# Altium PCB HW_PCB.PcbDoc
Units mil, origin at the board's own origin, x right, y up, seen from the top; angles counter-clockwise.
Board outline 3602.36 x 3366.14 mil, 2 copper layers (Top Layer, Bottom Layer); 78 components, 64 nets, 285 pads, 21 vias.
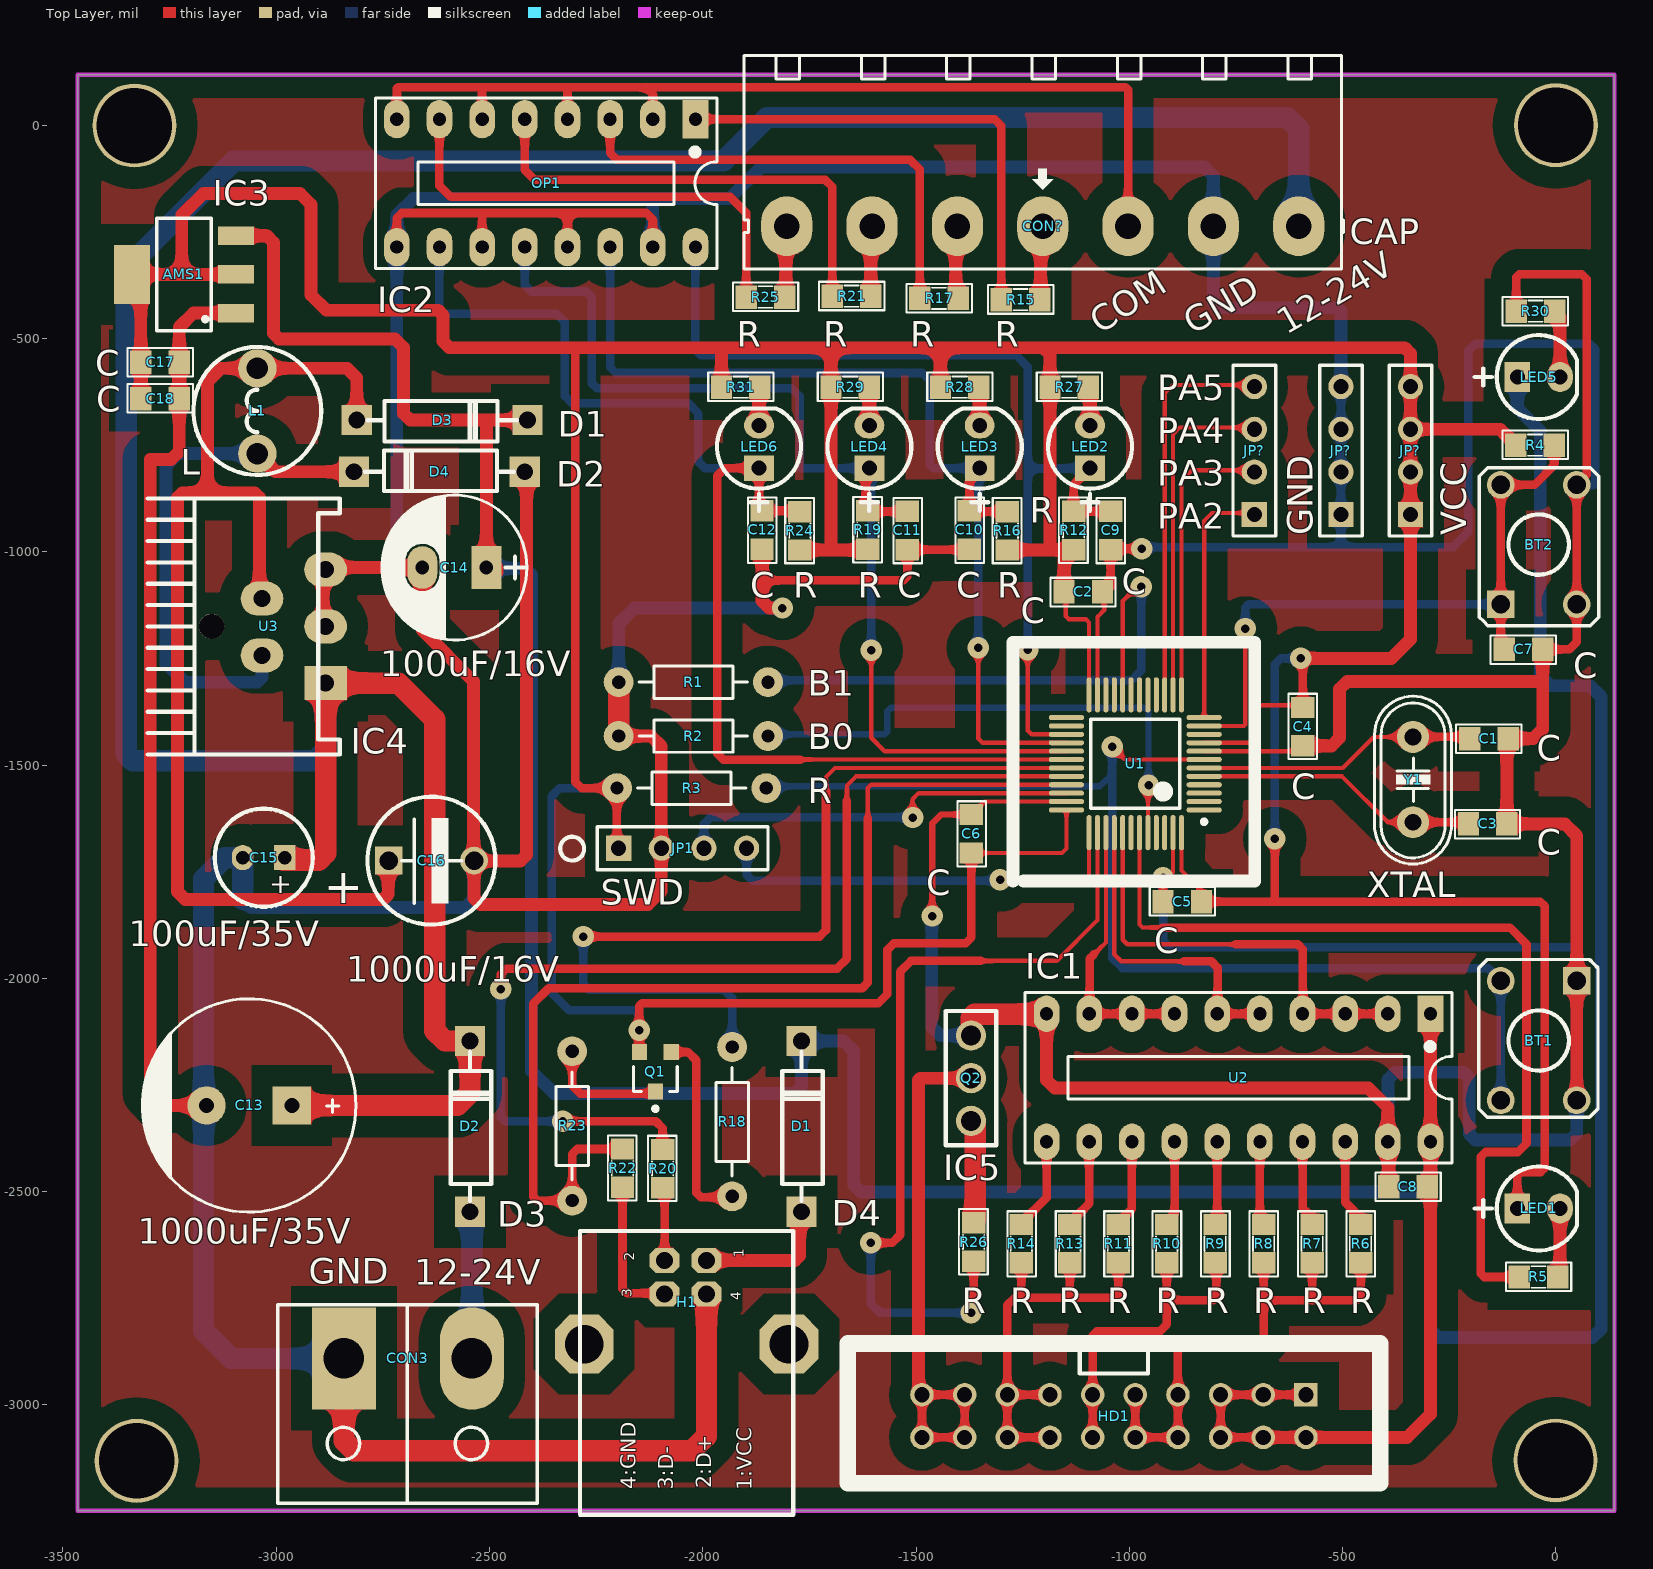
[diagram p0: Top Layer view]
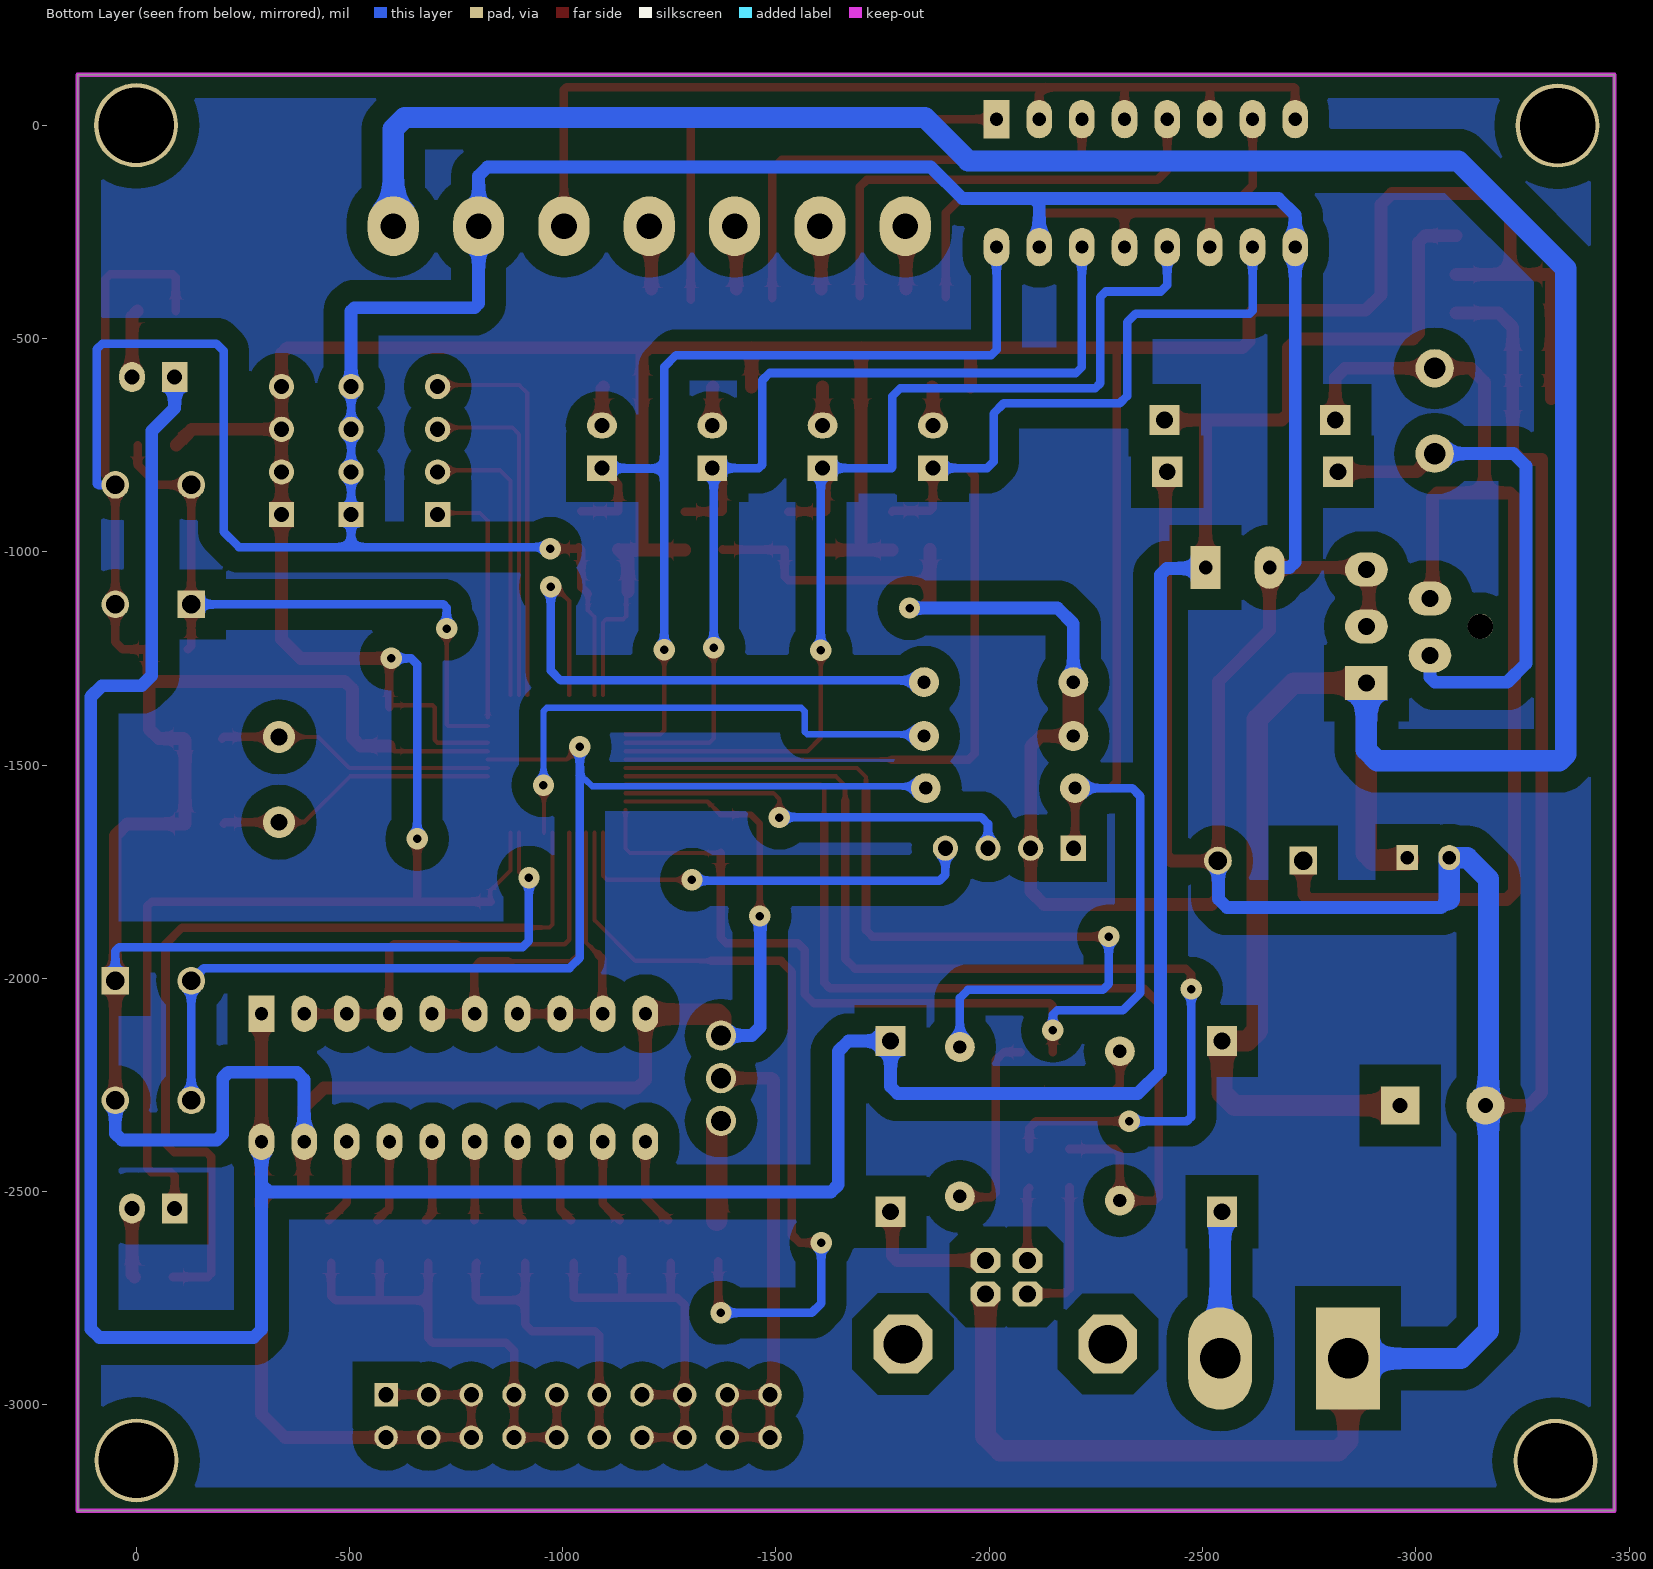
[diagram p1: Bottom Layer view, seen from below]

## Layer stack, top to bottom
Top Solder: solder mask 0.4, Solder Resist, Dk 3.5
Top Layer: signal copper 1.4
Dielectric 1: dielectric 12.6, FR-4, Dk 4.8
Bottom Layer: signal copper 1.4
Bottom Solder: solder mask 0.4, Solder Resist, Dk 3.5

## Board outline
-3465.3,-3247.9 -3465.3,118.25 137.07,118.25 137.07,-3247.9

## Design rules (kind name [scope] priority, off if disabled: settings)
Clearance [All] p1: gap=9 ignorepadtopadclearanceinfootprint=FALSE except(50: Arc-Poly Track-Poly SMDPad-Poly THPad-Poly Via-Poly Fill-Poly Poly-Poly)
PolygonConnect [All] p1: connectstyle=Relief reliefconductorwidth=10 reliefentries=4 polygonreliefangle="90 Angle" airgapwidth=10
RoomDefinition HW_SCH [InComponentClass('HW_SCH')] p1: confinementstyle=ConfineIn formatcopy=TRUE lockcomponents=FALSE outline -30306,-17046 -28306,-17046 -28306,-16046 -30306,-16046
RoutingVias [All] p1: holewidth=28 width=50 viastyle="Through Hole" minholewidth=28 minwidth=50 maxholewidth=28 maxwidth=50
SolderMaskExpansion [All] p1: expansion=4
Width [All] p1: maxlimit=70 minlimit=10 preferedwidth=10
30 further rules are at their usual default settings.

## Components (designator, comment, footprint, x,y, rotation, side; value= is the part's Value field where it differs from the comment)
AMS1 "AMS1117-3.3V SOT223 _MH" SOT223 -3216,-350 r90 top
BT1 "BUTTON 4P 6x6_MH" "BUTTON 4 PIN(6*6)" -40.37,-2145.75 r270 top
BT2 "BUTTON 4P 6x6_MH" "BUTTON 4 PIN(6*6)" -40.37,-983.25 r90 top
C1 "20p" TU_SMD_0805 -157,-1438 r0 top
C2 "104" TU_SMD_0805 -1108,-1094 r0 top
C3 "20p" TU_SMD_0805 -160,-1638 r0 top
C4 "104" TU_SMD_0805 -593,-1410 r270 top
C5 "104" TU_SMD_0805 -876,-1820 r180 top
C6 "104" TU_SMD_0805 -1370,-1661 r90 top
C7 "104" TU_SMD_0805 -76,-1229 r0 top
C8 "104" TU_SMD_0805 -347,-2489 r180 top
C9 "104" TU_SMD_0805 -1044,-950 r90 top
C10 "104" TU_SMD_0805 -1374.71,-949 r90 top
C11 "104" TU_SMD_0805 -1520,-950 r90 top
C12 "104" TU_SMD_0805 -1861,-949 r90 top
C13 "10uF" CP2/5 -3063,-2298 r180 top value=10uF/50V
C14 "100uF/16V" "TU_HOA(100uF/35V - 470uF/16V)" -2582,-1037 r180 top value=100uF/35V/50V
C15 "100uF - 35V" "TU HOA 8mm" -3029,-1717 r180 top
C16 "1000uF - 16V" "TU HOA 1000uF25V" -2636,-1724 r180 top
C17 "104" TU_SMD_0805 -3272,-556 r180 top
C18 "106" TU_SMD_0805 -3272,-641 r180 top
CON3 "CON 2 KF762_MH" "Con 2 KF762" -2691,-2891 r0 top
CON? "CON 7 EDG 5.08_MH" "Con 7 EDG 5.08" -1203,-237 r180 top
D1 "ss34" SS14 -1766,-2366 r90 top
D2 "Diode 1N4001 DO41 1A 50V (DIP)_MH" SS14 -2543,-2366 r90 top
D3 "ss34" SS14 -2630,-694 r0 top
D4 "ss34" SS14 -2598,-810 r180 top
H1 "USB_MH" USB-B-STRANGE -1991,-2661 r90 top
HD1 "IDE 20" "CABLE 20" -586,-2976 r180 top
JP1 "KHOI NAP" "Jump 4" -2047,-1695 r0 top
JP? "Jump 4_MH" "Jump 4" -707,-763 r90 top
JP? "Jump 4_MH" "Jump 4" -341,-763 r90 top
JP? "Jump 4_MH" "Jump 4" -504,-763 r90 top
L1 "100uH/3A" L100uH3A -3044,-670 r90 top
LED1 "LED3" "LED 3mm Do" -40.37,-2539.45 r0 top
LED2 "LED3" "LED 3mm Do" -1092,-754 r90 top
LED3 "LED3" "LED 3mm Do" -1350.67,-754 r90 top
LED4 "LED3" "LED 3mm Do" -1609.33,-754 r90 top
LED5 "LED3" "LED 3mm Do" -40.37,-590.55 r0 top
LED6 "LED3" "LED 3mm Do" -1868,-754 r90 top
OP1 "TLP521-4GB DIP16 _MH" DIP16 -2367,-136 r180 top value=TLP521-4
Q1 "A1015" SOT23 -2111,-2219 r180 top
Q2 "IRF540N TO220 MOSFET N-CH 28A 100V_MH" G_D_S_TO220 -1371,-2234 r90 top
R1 "2k2" "TRO_VACH_ 1/4W" -2197,-1305.67 r0 top
R2 "2k2" "TRO_VACH_ 1/4W" -2197,-1432 r0 top
R3 "10K" "TRO_VACH_ 1/4W" -1851,-1554 r180 top
R4 "10K" "Tro SMD 0805" -49,-750 r180 top
R5 "220" "Tro SMD 0805" -41,-2700 r180 top
R6 "220" "Tro SMD 0805" -458,-2622 r90 top
R7 "220" "Tro SMD 0805" -571.56,-2622 r90 top
R8 "220" "Tro SMD 0805" -685.13,-2622 r90 top
R9 "220" "Tro SMD 0805" -798.69,-2622 r90 top
R10 "220" "Tro SMD 0805" -912.26,-2622 r90 top
R11 "220" "Tro SMD 0805" -1025.82,-2622 r90 top
R12 "4k7" "Tro SMD 0805" -1130.57,-950 r270 top
R13 "220" "Tro SMD 0805" -1139.39,-2622 r90 top
R14 "220" "Tro SMD 0805" -1252.95,-2622 r90 top
R15 "2K2" "Tro SMD 0805" -1255,-409 r180 top
R16 "4k7" "Tro SMD 0805" -1286.14,-951 r270 top
R17 "2K2" "Tro SMD 0805" -1446,-406 r180 top
R18 "1K" "TRO_VACH_ 1/4W" -1931,-2161 r270 top
R19 "4k7" "Tro SMD 0805" -1613,-949 r270 top
R20 "22R" "Tro SMD 0805" -2094,-2446 r270 top
R21 "2K2" "Tro SMD 0805" -1651,-401 r180 top
R22 "22R" "Tro SMD 0805" -2188,-2445 r270 top
R23 "1.5k" "TRO_VACH_ 1/4W" -2306,-2171 r270 top
R24 "4k7" "Tro SMD 0805" -1772.43,-951 r270 top
R25 "2K2" "Tro SMD 0805" -1853,-403 r180 top
R26 "220" "Tro SMD 0805" -1365,-2618 r270 top
R27 "1K" "Tro SMD 0805" -1141,-614 r180 top
R28 "1K" "Tro SMD 0805" -1397.67,-614 r180 top
R29 "1K" "Tro SMD 0805" -1654.33,-614 r180 top
R30 "1k" "Tro SMD 0805" -48,-436 r0 top
R31 "1K" "Tro SMD 0805" -1911,-614 r180 top
U1 "STM32F103C8T6 LQFP48 _MH" 48A_M -986,-1497 r180 top
U2 "74HC245" dip20 -744,-2232 r180 top
U3 "LM2576T TO220-5_MH" LM2576t -3051,-1176 r90 top
Y1 "8Mhz" XT2 -335,-1534 r90 top

## Footprints (in the part's own frame and the unit in brackets; to place one, negate y for a bottom-side part, rotate by r counter-clockwise, add the part's x,y. Pads: shape width x height; smd on the part's side, far side on the other; paste and mask are expansions set on the pad)
48A_M [mm] "Thin QFP, 48-Leads, Body 7x7mm, Pitch 0.5mm, IPC Low Density"
  oval 2.1x0.3 smd: 1(-4.1,2.75) 2(-4.1,2.25) 3(-4.1,1.75) 4(-4.1,1.25) 5(-4.1,0.75) 6(-4.1,0.25) 7(-4.1,-0.25) 8(-4.1,-0.75) 9(-4.1,-1.25) 10(-4.1,-1.75) 11(-4.1,-2.25) 12(-4.1,-2.75) 25(4.1,-2.75) 26(4.1,-2.25) 27(4.1,-1.75) 28(4.1,-1.25) 29(4.1,-0.75) 30(4.1,-0.25) 31(4.1,0.25) 32(4.1,0.75) 33(4.1,1.25) 34(4.1,1.75) 35(4.1,2.25) 36(4.1,2.75)
  oval 0.3x2.1 smd: 13(-2.75,-4.1) 14(-2.25,-4.1) 15(-1.75,-4.1) 16(-1.25,-4.1) 17(-0.75,-4.1) 18(-0.25,-4.1) 19(0.25,-4.1) 20(0.75,-4.1) 21(1.25,-4.1) 22(1.75,-4.1) 23(2.25,-4.1) 24(2.75,-4.1) 37(2.75,4.1) 38(2.25,4.1) 39(1.75,4.1) 40(1.25,4.1) 41(0.75,4.1) 42(0.25,4.1) 43(-0.25,4.1) 44(-0.75,4.1) 45(-1.25,4.1) 46(-1.75,4.1) 47(-2.25,4.1) 48(-2.75,4.1)
  silkscreen extent -4.23,-2.65 2.65,3.57, body extent -3.5,-3.5 3.5,3.5, height 1.6
"BUTTON 4 PIN(6*6)" [mil] "BUTTON SMORE 280mil x 178mil"
  rect 65x65 hole 43.31: 1(-140,89)
  round 65 hole 43.31: 1(140,89) 2(-140,-89) 2(140,-89)
  silkscreen extent -190,-141 180,139, body extent -159,-124 153,120, height 276
"CABLE 20" [mm] "Connector; Header; 5x2 Position"
  rect 1.4x1.4 hole 0.9: 1(0,0)
  round 1.4 hole 0.9: 2(0,2.54) 3(2.54,0) 4(2.54,2.54) 5(5.08,0) 6(5.08,2.54) 7(7.62,0) 8(7.62,2.54) 9(10.16,0) 10(10.16,2.54) 11(12.7,0) 12(12.7,2.54) 13(15.24,0) 14(15.24,2.54) 15(17.78,0) 16(17.78,2.54) 17(20.32,0) 18(20.32,2.54) 19(22.86,0) 20(22.86,2.54)
  silkscreen extent -4.42,-3.05 27.28,5.27, body extent -5.02,-3.63 27.88,5.77, height 9.3
"Con 2 KF762" [mil]
  rect 150x240 hole 95: 1(-150,0)
  oval 150x240 hole 95: 2(150,0)
  silkscreen extent -306,-339 304,126
"Con 7 EDG 5.08" [mil]
  oval 120x140 hole 60: 1(-600,0) 2(-400,0) 3(-200,0) 4(0,0) 5(200,0) 6(400,0) 7(600,0)
  silkscreen extent -705,-400 700,100, body extent -696,-402 697,70, height 334
CP2/5 [mil] "Tu hoa 1000uF/25V,50V"
  rect 90x90 hole 35: 1(-100,0)
  round 90 hole 35: 2(100,0)
  silkscreen extent -250,-250 250,250, body extent -241,-247 251,245, height 984
DIP16 [mil] "16 PIN, W 300mil, Pin to pin 100mil"
  rect 60x90 hole 31: 1(-350,-150)
  oval 60x90 hole 31: 2(-250,-150) 3(-150,-150) 4(-50,-150) 5(50,-150) 6(150,-150) 7(250,-150) 8(350,-150) 9(350,150) 10(250,150) 11(150,150) 12(50,150) 13(-50,150) 14(-150,150) 15(-250,150) 16(-350,150)
  silkscreen extent -400,-200 400,200, body extent -402,-207 402,206, height 299
dip20 [mil]
  rect 60x85 hole 31: 1(-450,-149)
  oval 60x85 hole 31: 2(-350,-149) 3(-250,-149) 4(-150,-149) 5(-50,-149) 6(50,-149) 7(150,-149) 8(250,-149) 9(350,-149) 10(450,-149) 11(450,151) 12(350,151) 13(250,151) 14(150,151) 15(50,151) 16(-50,151) 17(-150,151) 18(-250,151) 19(-350,151) 20(-450,151)
  silkscreen extent -500,-199 500,201, body extent -541,-167 495,173, height 155
G_D_S_TO220 [mm]
  round 1.8 hole 1.2: 1(-2.54,0) 2(0,0) 3(2.54,0)
  silkscreen extent -4,-1.5 4,1.5, body extent -5.16,-1.71 5,2.5, height 20.36
"Jump 4" [mm]
  rect 1.5x1.5 hole 0.9: 1(-3.81,0)
  round 1.5 hole 0.9: 2(-1.27,0) 3(1.27,0) 4(3.81,0)
  silkscreen extent -5.08,-1.27 5.08,1.27, body extent -5.08,-1.27 5.08,1.27, height 7
L100uH3A [mil] "100uH3A"
  round 90 hole 50: 1(-100,0) 2(100,0)
  silkscreen extent -150,-150 150,150
"LED 3mm Do" [mil] "Footprintf LED phi 3"
  rect 60x70 hole 35: 1(-50,0)
  oval 60x70 hole 35: 2(50,0)
  silkscreen extent -150,-98 90,98, body extent -77,-78 60,78, height 205
LM2576t [mil]
  rect 80x100 hole 40: 1(-132,-167.09)
  oval 80x100 hole 40: 2(-67,-18) 3(1,-167) 4(66,-18) 5(134,-167)
  round 59.06 hole 59.06: ""(1,100)
  silkscreen extent -299,-200 301,250, body extent -199,-175 201,150, height 859
SOT23 [mm] "SOT-23; 3 Leads; Body 3.1 x 2.5 mm, inc. leads (LxW max), Alternate Lead Configuration"
  rect 0.9x0.95 smd: 1(-0.95,-1.175) 2(0.95,-1.175) 3(0,1.175)
  silkscreen extent -1.3,-0.3 1.3,2.32, body extent -1.5,-1.25 1.5,1.25, height 1.05
SOT223 [mm] "SOT-223/SC-73; 4 Leads; Body 6.7 x 7.3 mm, inc. leads (LxW max)"
  rect 1.1x2.15 smd: 1(-2.3,-3.1) 2(0,-3.1) 3(2.3,-3.1)
  rect 3.5x2.15 smd: 4(0,3.1)
  silkscreen extent -3.35,-1.63 3.35,1.63, body extent -3.43,-1.65 3.43,1.65, height 2.54
SS14 [mm]
  rect 1.8x1.8 hole 1: 1(-4.595,0.064) 2(5.565,0.064)
  silkscreen extent -3.96,-1.21 4.93,1.21, body extent -4.98,-1.22 5.95,1.35, height 2.55
"Tro SMD 0805" [mil]
  rect 50x55 smd: 1(-45,0) 2(45,0)
  silkscreen extent -77,-34 76,33, body extent -62,-28 56,27, height 21
"TRO_VACH_ 1/4W" [mil] "R 1/4W, 2 Pin, 350mil"
  round 70 hole 31: 1(0,0) 2(350,0)
  silkscreen extent 48,-38 302,38, body extent -40,-47 386,47, height 111
"TU HOA 8mm" [mm]
  rect 1.3x1.5 hole 0.8: 1(-1.25,0)
  oval 1.3x1.5 hole 0.8: 2(1.25,0)
  silkscreen extent -2.92,-2.92 2.92,2.92, body extent -3.15,-3.15 3.16,3.15, height 11.51
"TU HOA 1000uF25V" [mil]
  rect 65x65 hole 43.31: 1(100,0)
  round 65 hole 43.31: 2(-100,0)
  silkscreen extent -150,-150 150,150, body extent -195,-200 205,200, height 400
"TU_HOA(100uF/35V - 470uF/16V)" [mil]
  rect 70x100 hole 32: 1(-75,0)
  oval 70x100 hole 32: 2(75,0)
  silkscreen extent -170,-170 170,170, body extent -160,-157 155,157, height 446
TU_SMD_0805 [mil]
  rect 50x55 smd: 1(-45,0) 2(45,0)
  silkscreen extent -77,-34 76,33, body extent -40,-27 40,23, height 24
USB-B-STRANGE [mm] "USB Type B - STRANGE - Slave Device"
  oct 1.5x1.8 hole 1: 1(0,0) 2(0,2.5) 3(-2,2.5) 4(-2,0)
  oct 3.5x3.5 hole 2.3: 5(-4.988,7.283) 6(-4.988,-4.909)
  silkscreen extent -15.15,-5.16 1.74,7.54, body extent -15.45,-6.18 0.85,8.68, height 10.98
XT2 [mm] "Footpin for Crystal 2 pin"
  round 1.905 hole 1: 1(-2.54,0) 2(2.54,0)
  silkscreen extent -5.03,-2.29 4.96,2.29, body extent -5.93,-2.36 5.42,2.29, height 3.5

## Part data
BT1 BT2: "Nút nh?n 4 chân, 6x6mm, c?m"
C1 C2 C3 C4 C5 C6 C7 C8 C9 C10 C11 C12 C17 C18: library part TU_SMD_0805_MH
C13: library part TU_HOA_47uF_100V_MH, "TU_HOA_47uF_100V_MH", Description 1="10 => 220uF/6,3V/10V - 10uF => 100uF/16V", Description 2="0,1uF => 33uF/50V - 10uF => 22uF/63V", Description 3="0,47uF => 10uF/100V"
C14: library part TU_HOA_100uF_16V_MH, "TU_HOA_100uF_16V", Description 1="1000uF/6,3V - 470uF/16V - 330uF - 25V", Description 2="220uF/35V - 100uF/50V - 63V - 4,7uF/200V", Description 3="22uF => 33uF100V - 3,3uF => 4,7uF/250V", Description 4="2,2uF =>3,3uF/350 - 2,2uF/400V - 1uF/450V"
C15: library part "Tu Hoa 100uF 35V", "C?m", Chung_Loai=C?m, Don_Vi=Con, Ma_Hang=MH002807, Ten_Linh_Kien="T? Hóa 100uF 35V 8x11MM"
C16: library part "Tu Nhom 1000uF - 16V", "Dán", Chung_Loai=Dán, Don_Vi=Con, Ma_Hang=MH004419, Ten_Linh_Kien="T? Nhôm 1000uF 16V 10x10MM"
CON3: "CON 2 KF762 - 2P 7.62mm"
CON?: "CON 7 EDG 5.08 (xanh cong)"
D1 D3 D4: library part "Diode 1N4007 1A_MH", "Diode 1N4007 1A"
D2: "Diode 1N4001 DO41 1A 50V (DIP)"
H1: "USB conector"
HD1: "IDE header 20P"
JP1: library part "Jump 4_MH", "Jump 4P 2.54"
JP? JP? JP?: "Jump 4P 2.54"
L1: library part L100uH3A, "Cuon cam"
LED1 LED2 LED3 LED4 LED5 LED6: library part "LED 3mm_MH", "LED 3mm"
Q1: library part "A1015 SOT23 TRANS PNP 0.15A 50V ( SMD-BA)_MH"
R1 R2 R3 R4 R5 R6 R7 R8 R9 R10 R11 R13 R14 R18 R23 R26: library part TRO_VACH_1/4W_MH
R12 R15 R16 R17 R19 R20 R21 R22 R24 R25 R27 R28 R29 R30 R31: library part TRO_SMD_0805_MH, "TRO_SMD_0805"
U2: library part "74HC245 DIP20_MH"
U3: "SIMPLE SWITCHER; 3A Step-Down Voltage Regulator", DigiKeyPartNumber=LM2576T-5.0-ND, Manufacturer="National Semiconductor", PackageTopMarking="NSUZXYTT*LM2576T*-5.0 P+", PartNumber=LM2576T-5.0, PowerWise=N, Code_JEDEC=TO-220-AB, ComponentLink1Description="LM2576 Datasheet", ComponentLink1URL=http://www.national.com/ds/LM/LM2576.pdf, ComponentLink2Description="LM2576 Web Page", ComponentLink2URL=http://www.national.com/pf/LM/LM2576.html, ComponentLink3Description="T05A Package Page", ComponentLink3URL=http://www.national.com/packaging/folders/t05a.html, CompType=Switcher, DatasheetVersion=Aug-2004, FirstPublished=4-Dec-2008, PackageDescription="TO-220, Molded, 5 Lead, Straight", PackageReference=T05A, PackageVersion="revJ, Jan-1992", PinCount=5, Publisher="Altium Limited", RoHS=O
Y1: library part "CRYSTAL_49S DIP_MH", "Crystal Oscillator", LatestRevisionDate=17-Jul-2002, LatestRevisionNote="Re-released for DXP Platform.", PackageReference=R38, Published=8-Jun-2000, Publisher="Altium Limited"

## Free pads (board coordinates)
  round 196.85 hole 177.17: 2(0,0) 3(-1,-3130) 4(-3327,-3131) 5(-3332,-1)

## Via types
v1: diameter 50, hole 20, Top Layer to Bottom Layer, tented both sides, 21 vias

## Nets (pads, with @x,y where several pads share a name; then routed paths per layer and width w, separated by ;. In a path a pad name is that pad's centre, name@x,y a point inside that pad or via, vN(x,y) a via of type N, cw(c..) or ccw(c..) an arc to the next point about the centre after c; other vN are vias at no path point)
3.3V: AMS1.2 AMS1.4 C2.1 C4.1 C5.1 C6.1 C17.2 C18.2 JP1.1 JP?.1@-341,-913 JP?.2@-341,-813 JP?.3@-341,-713 JP?.4@-341,-613 LED1.1 Q1.2 R3.2 R4.2 R12.2 R16.2 R19.2 R24.2 R27.2 R28.2 R29.2 R31.2 U1.9 U1.24 U1.36 U1.48 | length 13438.1
  Top Layer w10: C6.1 -1158,-1706 -1147.42,-1695.42 U1.36 ; C2.1 -1149,-1098 -1149,-1151 -1142,-1158 -1102,-1158 -1094.27,-1165.73 U1.24 ; U1.48 -877.73,-1747.27 -830,-1795 C5.1@-830,-1820 ; U1.9 -706.79,-1447.79 -700,-1441 -700,-1365 -695,-1360 -598,-1360 C4.1
  Top Layer w20: -2294,-521.67 -2299,-526.67 -2299,-1539 -2284,-1554 R3.2 -2201,-1672 JP1.1@-2178,-1695 ; v1(-2149,-2122) -2149,-2065 -2142,-2058 -1588,-2058 -1567,-2037 -1567,-1933 -1552,-1918 -1384,-1918 -1370,-1904 C6.1 ; Q1.2 v1@-2148.4,-2122 ; C5.1 -830,-1820 -37,-1820 -26,-1831 -26,-2444 -36,-2454 -81,-2454 -90.37,-2463.37 LED1.1 ; -659,-1817 v1(-659,-1673) ; v1(-598,-1250) -593,-1255 C4.1
  Top Layer w30: C18.2 C17.2 -3317,-371.05 AMS1.4 -3221,-350 ; AMS1.2 -3221,-350 ; R31.2 -1956,-538 ; R24.2 -1701,-996 ; R19.2 -1615,-996 -1701,-996 ; R28.2 -1442.67,-521.67 ; R16.2 -1182,-996 ; C2.1 -1153,-1017.43 R12.2@-1131.57,-996 ; R12.2 R12.2@-1131.57,-996 ; v1(-598,-1250) -386,-1250 -341,-1205 -341,-913 -341,-813 JP?.3@-341,-713 ; R4.2 -131,-713 JP?.3@-341,-713 ; -3221,-350 -3221,-211 -3170,-160 -2944,-160 -2918,-186 -2918,-398 -2882,-434 -2620,-434 -2608.5,-445.5 -2608.5,-506.5 -2593.33,-521.67 -2294,-521.67 -1699.33,-521.67 ; -1701,-996 -1699.33,-994.33 R29.2 -1699.33,-521.67 ; -1699.33,-521.67 -1442.67,-521.67 ; -1442.67,-521.67 -1202.33,-521.67 ; -1202.33,-521.67 -354.33,-521.67 -341,-535 -341,-613 JP?.3@-341,-713 ; -1202.33,-521.67 -1186,-538 R27.2 -1186,-992 -1182,-996 ; -1182,-996 R12.2@-1131.57,-996
  Bottom Layer w20: R3.2 -2335,-1554 -2354,-1573 -2354,-2034 -2313,-2075 -2159,-2075 -2149,-2085 v1(-2149,-2122) ; v1(-659,-1673) -659,-1264 -645,-1250 v1(-598,-1250)
5V: AMS1.3 C8.1 C14.1 D1.2 D3.2 HD1.1 HD1.2 HD1.3 HD1.4 HD1.5 HD1.6 LED5.1 U2.1 U2.20 | length 10262.7
  Top Layer w20: HD1.4 HD1.6 HD1.5 HD1.3 HD1.1
  Top Layer w30: AMS1.3 -3021.55,-259.45 -3006,-275 -3006,-488 -2993,-501 -2721,-501 -2701,-521 -2701,-676 -2685.52,-691.48 D3.2 ; C14.1 -2507,-695 ; C14.1@-2482,-1048 C14.1@-2482,-1037 ; HD1.4 HD1.2 -349,-3076 -294,-3021 U2.20 U2.1
  Bottom Layer w30: C14.1 -2505,-1039 -2416,-1039 -2401,-1054 -2401,-2217 -2348,-2270 -1785,-2270 -1768.52,-2253.52 D1.2 -1670.09,-2146.91 -1646,-2171 -1646,-2484 -1629,-2501 -312,-2501 -294,-2483 ; U2.20 -294,-2483 ; LED5.1 -90.37,-663.63 -37,-717 -37,-1290 -13,-1314 80,-1314 106,-1340 106,-2822 86,-2842 -275,-2842 -294,-2823 -294,-2483
12V: C13.1 C15.1 CON?.1 D2.2 U3.1 | length 7089.6
  Top Layer w50: C15.1 -2982.79,-1720 -2982.79,-1723 -2900,-1723 -2883.91,-1706.91 U3.1 -2713,-1308 -2628,-1393 -2628,-2123 -2604.09,-2146.91 D2.2 -2545.52,-2268 -2575.52,-2298 C13.1
  Bottom Layer w50: U3.1 -2883.91,-1464.91 -2909,-1490 -3336,-1490 -3351,-1475 -3351,-336 -3099,-84 -1951,-84 -1849,18 -630,18 -603,-9 CON?.1
A2: JP?.1@-707,-913 U1.12 | length 586.4
  Top Layer w10: U1.12 -824.58,-927.58 -806,-909 JP?.1@-707,-909
A3: JP?.2@-707,-813 U1.13 | length 682.8
  Top Layer w10: U1.13 -877.73,-833.73 -853,-809 JP?.2@-707,-809
A4: JP?.3@-707,-713 U1.14 | length 808
  Top Layer w10: U1.14 -897.42,-724.42 -882,-709 JP?.3@-707,-709
A5: JP?.4@-707,-613 U1.15 | length 925.5
  Top Layer w10: U1.15 -917.1,-628.1 -898,-609 JP?.4@-707,-609
"BOOT 0": R2.2 U1.44 | length 1235.8
  Top Layer w10: U1.44 -956.47,-1548.47 v1(-955,-1547)
  Bottom Layer w15: R2.2 -1843,-1428 -1573,-1428 -1567,-1422 -1567,-1374 -1559,-1366 -963,-1366 -955,-1374 v1(-955,-1547)
"BOOT 1": R1.2 U1.20 | length 1374.5
  Top Layer w10: U1.20 -1015.53,-1115.53 -972,-1072 v1(-972,-1082)
  Bottom Layer w20: R1.2 -1843,-1301.67 -995,-1301.67 -972,-1278.67 v1(-972,-1082)
BT: BT2.1 C7.1 R4.1 U1.11 | length 1554.6
  Top Layer w10: U1.11 -731.42,-1408.42 -728,-1405 v1(-728,-1180)
  Top Layer w20: C7.1 -129.37,-1220.63 -129.37,-1123.25 -129.37,-843.25 -50.25,-843.25 -4,-797 R4.1
  Bottom Layer w20: v1(-728,-1180) -728,-1131 -720.25,-1123.25 BT2.1@-129.37,-1123.25
BT1: C9.2 LED2.1 OP1.16 R12.1 U1.27 | length 2443.9
  Top Layer w10: v1(-1238,-1230) -1238,-1419 -1228.9,-1428.1 U1.27
  Top Layer w20: LED2.1 -1130.57,-842.57 R12.1 C9.2
  Bottom Layer w20: OP1.16 -2017,-527 -2005,-539 -1266,-539 -1238,-567 -1238,-805 ; v1(-1238,-1230) -1238,-805 ; -1203,-804 LED2.1 -1093,-805 -1238,-805
BT2: C10.2 LED3.1 OP1.14 R16.1 U1.28 | length 2406.9
  Top Layer w10: v1(-1354,-1225) -1354,-1438 -1344.21,-1447.79 U1.28
  Top Layer w20: LED3.1 -1374.71,-828.05 C10.2 -1372.71,-906 R16.1
  Bottom Layer w20: OP1.14 -2217,-567 -2203,-581 -1485,-581 -1468,-598 -1468,-796 -1460,-804 LED3.1 -1354,-807.33 v1(-1354,-1225)
BT3: C11.2 LED4.1 OP1.12 R19.1 U1.29 | length 2587.9
  Top Layer w10: v1(-1605,-1231) -1605,-1436 -1573.53,-1467.47 U1.29
  Top Layer w20: LED4.1 -1617.86,-812.52 -1617.86,-904 -1615.86,-906 C11.2@-1529.29,-906
  Bottom Layer w20: OP1.12 -2417,-375 -2402,-390 -2273,-390 -2260,-403 -2260,-605 -2248,-617 -1791,-617 -1773,-635 -1773,-802 -1771,-804 LED4.1 -1605,-808.33 v1(-1605,-1231)
BT4: C12.2 LED6.1 OP1.10 R24.1 U1.30 | length 2991.6
  Top Layer w10: -1771.84,-1487.16 U1.30
  Top Layer w20: R24.1 -1774.43,-904 C12.2 -1868,-897 LED6.1 -1948,-804 -1966,-822 -1966,-1473 -1951.84,-1487.16 -1771.84,-1487.16
  Bottom Layer w20: OP1.10 -2617,-435 -2610,-442 -2343,-442 -2323,-462 -2323,-635 -2306,-652 -2034,-652 -2010,-676 -2010,-789 -1995,-804 LED6.1
CD_CLK: HD1.7 HD1.8 HD1.9 HD1.10 R6.1 R7.1 R8.1 | length 1191.3
  Top Layer w20: HD1.9 HD1.10 HD1.8 HD1.7 -886,-2873 -867,-2854 -695,-2854 -685.13,-2844.13 -685.13,-2755 ; R8.1 -685.13,-2755 ; R7.1 -571.56,-2754.44 -571,-2755 ; R6.1 -457,-2668 -457,-2744 -468,-2755 -571,-2755 ; -685.13,-2755 -571,-2755
CD_DATA: HD1.11 HD1.12 R9.1 R10.1 | length 767.9
  Top Layer w20: HD1.12 HD1.11 -1086,-2837 -1076,-2827 -928,-2827 -912.26,-2811.26 -912.26,-2754 ; R10.1 -912.26,-2754 ; R9.1 -796,-2669.69 -796,-2747 -803,-2754 -912.26,-2754
CD_STB: HD1.13 HD1.14 HD1.15 HD1.16 R11.1 R13.1 R14.1 | length 1031.5
  Top Layer w20: R14.1 -1252.95,-2746.95 -1255,-2749 ; HD1.14 HD1.16 HD1.15 ; HD1.13 HD1.15 ; R13.1@-1139.39,-2659 R13.1 -1139.39,-2747.39 -1141,-2749 ; R11.1 -1025.82,-2746.82 -1028,-2749 -1141,-2749 ; HD1.15 -1286,-2766 -1269,-2749 -1255,-2749 ; -1255,-2749 -1141,-2749
FED: R26.2 U1.38 | length 1920.9
  Top Layer w10: -1348,-1959 -1170,-1959 -1074.58,-1863.58 U1.38
  Top Layer w20: v1(-1606,-2620) -1556,-2620 -1537,-2601 -1537,-1984 -1512,-1959 -1348,-1959 ; v1(-1371,-2784) -1365,-2778 R26.2
  Bottom Layer w20: v1(-1606,-2620) -1606,-2762 -1584,-2784 v1(-1371,-2784)
GND: AMS1.1 BT1.1 BT2.2 C1.2 C2.2 C3.2 C4.2 C5.2 C6.2 C7.2 C8.2 C9.1 C10.1 C11.1 C12.1 C13.2 C14.2 C15.2 C16.2 C17.1 C18.1 CON3.1 CON?.2 D4.1 H1.4 JP1.2 JP?.1@-504,-913 JP?.2@-504,-813 JP?.3@-504,-713 JP?.4@-504,-613 OP1.9 OP1.11 OP1.13 OP1.15 Q2.3 R1.1 R2.1 R30.1 U1.8 U1.23 U1.35 U1.47 U2.10 U2.19 U3.3 U3.5 | length 25561.8
  Top Layer w10: C6.2 -1339.58,-1585.58 U1.35 ; U1.23 -1074.58,-1152.58 -1059,-1137 C2.2@-1059,-1098 ; C5.2 v1(-921,-1764) ; -897.42,-1751.42 U1.47 ; U1.8 -605.47,-1467.47 C4.2
  Top Layer w15: v1@-1464,-1852 v1(-1462,-1854) -1462,-1637 -1441,-1616 C6.2
  Top Layer w20: OP1.9 -2717,-218 -2705,-206 -2520,-206 ; OP1.11 -2517,-209 -2520,-206 ; OP1.13 -2317,-206 ; OP1.15 -2117,-221 -2132,-206 -2317,-206 ; -1861,-1067 -1529,-1067 -1520,-1058 C11.1 -1375.71,-995 C10.1 ; C2.2@-1059,-1098 -1044,-1083 C9.1 -1038,-989 -1034,-993 v1(-971,-993) ; R30.1 -93,-357 -86,-350 61,-350 72,-361 72,-819.88 48.63,-843.25 48.63,-1123.25 48.63,-1211.37 31,-1229 C7.2 ; -2520,-206 -2317,-206
  Top Layer w30: C13.2 -3265,-2298 -3295,-2268 -3295,-784 -3246,-784 -3227,-765 C18.1 C17.1 -3227,-474 -3193.55,-440.55 AMS1.1 ; U3.3@-2890,-1172 U3.5@-2890,-1039 ; U3.5 -2887,-1039 U3.5@-2890,-1039 ; C14.2@-2657,-1039 -2657,-1184 -2537,-1304 -2537,-1725 C16.2 C16.2@-2536,-1725 ; C14.2 -2888,-1037 U3.5@-2890,-1039 ; D4.1@-2412.91,-812.52 -2412.91,-1710.91 -2427,-1725 C16.2@-2536,-1725 ; R2.1@-2200,-1429 R2.1 -2121,-1432 -2097,-1456 JP1.2 -2097,-1796 -2128,-1827 -2521,-1827 -2536,-1812 C16.2@-2536,-1725 ; R1.1@-2199.67,-1303 R1.1 ; C12.1 -1861,-1067 -1861,-1115 -1844,-1132 v1(-1813,-1132) ; U2.10@-1195,-2084 U2.10@-1194,-2085 ; U2.10 U2.10@-1194,-2085 ; C4.2 -526,-1455 -507,-1436 -507,-1322 -489,-1304 -35,-1304 -31,-1300 ; C8.2 -392,-2385 U2.19 -394,-2303 -440,-2257 -1175,-2257 -1194,-2238 U2.10@-1194,-2085 ; C7.2 -31,-1300 ; BT1.1@48.63,-2285.75 48.63,-2005.75 48.63,-1665.63 21,-1638 C3.2 -115,-1441 C1.2 -53,-1438 -31,-1416 -31,-1300
  Top Layer w50: CON3.1 -2841,-3084 -2818,-3107 -2025,-3107 -1991,-3073 H1.4 ; R2.1 R1.1 ; Q2.3 -1371,-2092 -1363,-2084 U2.10@-1195,-2084
  Bottom Layer w20: v1(-971,-993) -967,-989 -504,-989 ; v1(-921,-1764) -921,-1912 -906,-1927 39.63,-1927 48.63,-1936 BT1.1@48.63,-2005.75 ; JP?.4@-504,-613 -504,-713 -504,-813 -504,-913 -504,-989 ; BT2.2@48.63,-843.25 89.75,-843.25 92,-841 92,-525 79,-512 -188,-512 -205,-529 -205,-953 -241,-989 -504,-989
  Bottom Layer w30: -3078.21,-1814.79 -3059,-1834 -2557,-1834 -2537,-1814 C16.2@-2537,-1728 ; C14.2 -2704,-1037 -2717,-1024 OP1.9 -2717,-211 -2678,-172 -2104,-172 ; R1.1 -2197,-1169 -2160,-1132 v1(-1813,-1132) ; OP1.15 -2117,-185 -2104,-172 ; v1(-1462,-1854) -1463,-1855 -1463,-2114 -1443,-2134 Q2.3 ; JP?.4@-504,-613 -504,-436 -512,-428 -793,-428 -803,-418 CON?.2 -803,-119 -824,-98 -1863,-98 -1937,-172 -2104,-172 ; U2.19 -394,-2237 -377,-2220 -216,-2220 -203,-2233 -203,-2365 -189,-2379 33,-2379 48.63,-2363.37 BT1.1@48.63,-2285.75
  Bottom Layer w50: -3078.21,-1814.79 C15.2 -3120,-1717 -3170,-1767 -3170,-2826 -3105,-2891 CON3.1
GND_OPTO: CON?.3 OP1.2 OP1.4 OP1.6 OP1.8 | length 2342.6
  Top Layer w20: OP1.8 -2717,86 -2714,89 -2515,89 ; OP1.6 -2517,87 -2515,89 ; OP1.4 -2317,87 -2315,89 ; OP1.2 -2117,74 -2132,89 ; CON?.3 -1003,83 -1009,89 -2132,89 ; -2515,89 -2315,89 ; -2315,89 -2132,89
INPUT1: CON?.4 R15.1 | length 149.1
  Top Layer w30: R15.1@-1208,-384 -1208,-242 CON?.4
INPUT2: CON?.5 R17.1 | length 148.7
  Top Layer w30: R17.1@-1407,-384 -1407,-241 CON?.5
INPUT3: CON?.6 R21.1 | length 148.2
  Top Layer w30: R21.1@-1606,-384 -1606,-240 CON?.6
INPUT4: CON?.7 R25.1 | length 147.8
  Top Layer w30: R25.1@-1805,-384 -1805,-239 CON?.7
LED_STATE1: R5.2 U1.43 | length 2095.9
  Top Layer w10: U1.43 -976.16,-1873.84 -969,-1881 -923,-1881
  Top Layer w20: -923,-1881 -108,-1881 -69,-1920 -69,-2387 -89,-2407 -165,-2407 -176,-2418 -176,-2692 -168,-2700 R5.2
NetC16_1: C16.1 D3.1 L1.2 U3.4 | length 2671.8
  Top Layer w30: -3161,-862 -3161,-602 -3129,-570 L1.2 -2834,-570 -2810.91,-593.09 D3.1 ; U3.4@-3039,-1107 -3039,-873 -3050,-862 -3220,-862 -3231,-873 -3231,-1797 -3213,-1815 -2749,-1815 -2737,-1803 C16.1@-2737,-1728
NetCON3_2: CON3.2 D2.1 | length 346
  Bottom Layer w50: D2.1 -2541,-2551.43 CON3.2
NetD1_1: D1.1 H1.1 | length 327.5
  Top Layer w30: H1.1 -1784,-2661 -1773,-2650 -1773,-2551.39 D1.1
NetD4_2: D4.2 L1.1 U3.2 | length 1232.7
  Top Layer w30: L1.1 -3001.48,-812.52 D4.2
  Bottom Layer w30: L1.1 -3229,-770 -3258,-799 -3258,-1262 -3214,-1306 -3045,-1306 -3033,-1294 U3.2
NetH1_2: H1.2 R20.2 | length 171.9
  Top Layer w20: R20.2 -2089.43,-2495.57 H1.2
NetH1_3: H1.3 R22.2 | length 340.9
  Top Layer w20: R22.2 -2188,-2727 -2177,-2738 -2091.16,-2738 H1.3
NetHD1_17: HD1.17 HD1.18 HD1.19 HD1.20 Q2.2 | length 1267.6
  Top Layer w20: HD1.18 HD1.18@-1386,-3072 ; HD1.18@-1386,-3072 -1390,-3076 HD1.20 HD1.19 HD1.17 HD1.18@-1386,-3072
  Top Layer w30: HD1.19 -1494,-2968 -1494,-2238 -1490,-2234 Q2.2
NetLED1_2: LED1.2 R5.1 | length 162.9
  Top Layer w30: R5.1 9.63,-2694.37 LED1.2
NetLED2_2: LED2.2 R27.1 | length 91.7
  Top Layer w30: R27.1 -1092,-618 LED2.2
NetLED3_2: LED3.2 R28.1 | length 90.8
  Top Layer w30: R28.1 -1350.67,-616 LED3.2
NetLED4_2: LED4.2 R29.1 | length 90
  Top Layer w30: LED4.2 R29.1
NetLED5_2: LED5.2 R30.2 | length 159.8
  Top Layer w30: R30.2 9.63,-448.63 LED5.2
NetLED6_2: LED6.2 R31.1 | length 90.8
  Top Layer w30: LED6.2 -1868,-616 R31.1
NetOP1_1: OP1.1 R15.2 | length 1130.6
  Top Layer w20: OP1.1 -1316,14 -1300,-2 R15.2
NetOP1_3: OP1.3 R17.2 | length 1123.2
  Top Layer w20: OP1.3 -2217,-65 -2201,-81 -1514,-81 -1491,-104 R17.2
NetOP1_5: OP1.5 R21.2 | length 1112.6
  Top Layer w20: OP1.5 -2417,-105 -2394,-128 -1713,-128 -1696,-145 R21.2
NetOP1_7: OP1.7 R25.2 | length 1098.5
  Top Layer w20: OP1.7 -2617,-142 -2591,-168 -1936,-168 -1898,-206 R25.2
NetQ1_1: Q1.1 R18.2 | length 466
  Top Layer w20: Q1.1 -2034.26,-2172.74 -2015,-2192 -2015,-2502 -2004,-2513 -1933,-2513 R18.2
NetQ1_3: Q1.3 R23.1 | length 284.8
  Top Layer w20: R23.1 -2306,-2251 -2287,-2270 -2115.74,-2270 Q1.3
NetQ2_1: Q2.1 R26.1 | length 237.7
  Top Layer w50: Q2.1 -1361,-2344 R26.1@-1361,-2567.6
NetR6_2: R6.2 U2.18 | length 201.4
  Top Layer w20: U2.18 -494,-2525 R6.2@-452,-2567
NetR7_2: R7.2 U2.17 | length 195.8
  Top Layer w20: U2.17 -594,-2538.56 R7.2@-565.56,-2567
NetR8_2: R8.2 U2.16 | length 190.2
  Top Layer w20: U2.16 -694,-2552.13 R8.2@-679.13,-2567
NetR9_2: R9.2 U2.15 | length 184.5
  Top Layer w20: U2.15 -794,-2565.69 R9.2@-792.69,-2567
NetR10_2: R10.2 U2.14 | length 189.1
  Top Layer w20: R10.2@-906.26,-2567 -894,-2554.74 U2.14
NetR11_2: R11.2 U2.13 | length 194.7
  Top Layer w20: R11.2@-1019.82,-2567 -994,-2541.18 U2.13
NetR13_2: R13.2 U2.12 | length 200.3
  Top Layer w20: R13.2@-1133.39,-2567 -1094,-2527.61 U2.12
NetR14_2: R14.2 U2.11 | length 205.9
  Top Layer w20: R14.2@-1246.95,-2567 -1194,-2514.05 U2.11
OSC_IN: C3.1 U1.5 Y1.1 | length 665.8
  Top Layer w10: U1.5 -501.47,-1526.53 -394,-1634 Y1.1
  Top Layer w20: Y1.1 -209,-1634 C3.1
OSC_OUT: C1.1 U1.6 Y1.2 | length 654.4
  Top Layer w10: U1.6 -499.84,-1506.84 -427,-1434 Y1.2
  Top Layer w20: Y1.2 -206,-1434 C1.1
OUT_CLK: U1.41 U2.2 U2.3 U2.4 | length 999.9
  Top Layer w10: U1.41 -1015.53,-1909.47 -1005,-1920 -750,-1920
  Top Layer w20: -750,-1920 -605,-1920 -593,-1932 U2.4@-593,-2049 ; U2.4 U2.3 U2.2
OUT_DATA: U1.40 U2.5 U2.6 | length 714.5
  Top Layer w10: U1.40 -1035.21,-1943.79 -1019,-1960 -871,-1960
  Top Layer w20: -871,-1960 -808,-1960 -793,-1975 U2.6@-793,-2049 ; U2.6 U2.5
OUT_STB: U1.39 U2.7 U2.8 U2.9 | length 606.4
  Top Layer w10: -1083,-1944 -1054.9,-1915.9 U1.39
  Top Layer w20: U2.9 U2.8 U2.7 ; U2.9@-1093,-2049 -1093,-1954 -1083,-1944
RESET: BT1.2 R3.1 U1.7 | length 2759.2
  Top Layer w10: v1(-1040,-1457) -1009.84,-1487.16 U1.7
  Bottom Layer w15: R3.1 -1847,-1550 -1069,-1550 -1053,-1534 -1050,-1534 -1040,-1524
  Bottom Layer w20: v1(-1040,-1457) -1040,-1524 -1040,-1952 -1016,-1976 -159.12,-1976 -129.37,-2005.75 BT1.2@-129.37,-2285.75
RESET_USB: R18.1 U1.31 | length 2095.2
  Top Layer w10: -1711,-1562 -1711,-1528 -1689.84,-1506.84 U1.31
  Top Layer w20: v1(-2280,-1902) -1726,-1902 -1711,-1887 -1711,-1562
  Bottom Layer w20: v1(-2280,-1902) -2280,-2013 -2266,-2027 -1950,-2027 -1931,-2046 R18.1
SCK: JP1.4 U1.37 | length 976.2
  Top Layer w10: v1(-1303,-1769) -1104,-1769 -1094.27,-1759.27 U1.37
  Bottom Layer w20: JP1.4 -1897,-1757 -1883,-1771 -1305,-1771 v1(-1303,-1769)
SWD: JP1.3 U1.34 | length 962.5
  Top Layer w10: v1(-1508,-1623) -1508,-1580 -1493.9,-1565.9 U1.34
  Bottom Layer w20: JP1.3 -1997,-1638 -1981,-1622 -1509,-1622 v1(-1508,-1623)
USB_D+: R22.1 R23.2 U1.33 | length 2508.8
  Top Layer w10: -1613,-1625 -1613,-1554 -1605.21,-1546.21 U1.33
  Top Layer w20: R22.1 -2294,-2400 -2306,-2412 R23.2 -2388,-2521 -2397,-2512 -2397,-2059 -2361,-2023 -1626,-2023 -1613,-2010 -1613,-1625
USB_D-: R20.1 U1.32 | length 2530.2
  Top Layer w10: -1662,-1584 -1662,-1548 -1640.53,-1526.53 U1.32
  Top Layer w20: v1(-2473,-2025) -2473,-1990 -2460,-1977 -1685,-1977 -1662,-1954 -1662,-1584 ; v1(-2328,-2335) -2110,-2335 -2094,-2351 R20.1
  Bottom Layer w20: v1(-2473,-2025) -2473,-2325 -2463,-2335 v1(-2328,-2335)
pads on no net: H1.5 H1.6 U1.1 U1.2 U1.3 U1.4 U1.10 U1.16 U1.17 U1.18 U1.19 U1.21 U1.22 U1.25 U1.26 U1.42 U1.45 U1.46 U3.

## Polygon pours and split planes (outlines as drawn)
no net on Top Layer "Top Layer-No Net" (solid, pour order 2): -3465.3,118.25 -3465.3,-3247.9 137.07,-3247.9 137.07,118.25
no net on Bottom Layer "Bottom Layer-No Net" (solid, pour order 0): -3465.3,118.25 137.07,118.25 137.07,-3247.9 -3465.3,-3247.9

## Keep-outs
Keep-Out Layer:
  the board outline again, w10

## Silkscreen, mask and mechanical layers (free items; w line width, h text height)
Top Overlay:
  circle w10: c-2306,-1696 r28.02
  lines w10: -1273,-1772 -1248,-1772
  lines w30: -1273,-1772 -1273,-1212 -706,-1212 -706,-1772 -1248,-1772
  text "IC3" at -3149,-189 h60
  text "CAP" at -483,-279 h60
  text "IC2" at -2763,-439 h60
  text "COM" at -1068,-491.83 h60 r33
  text "GND" at -851.43,-492 h60 r30
  text "12-24V" at -632,-492 h60 r30
  text "R" at -1920,-519 h60
  text "R" at -1717,-519 h60
  text "R" at -1513,-519 h60
  text "R" at -1316,-519 h60
  text "C" at -3424,-587 h60
  text "PA5" at -935,-645 h60
  text "C" at -3422,-672 h60
  text "D1" at -2340,-731 h60
  text "PA4" at -935,-745.33 h60
  text "L" at -3223,-819 h60
  text "PA3" at -935,-845.67 h60
  text "D2" at -2343,-848 h60
  text "R" at -1233,-932 h60
  text "PA2" at -935,-946 h60
  text "GND" at -570,-961 h60 r90
  text "VCC" at -210,-961 h60 r90
  text "C" at -1018,-1100 h60
  text "C" at -1889,-1108 h60
  text "R" at -1788,-1108 h60
  text "R" at -1636,-1108 h60
  text "C" at -1544,-1108 h60
  text "C" at -1406,-1108 h60
  text "R" at -1310,-1108 h60
  text "C" at -1254,-1168 h60
  text "100uF/16V" at -2756,-1292 h60
  text "C" at 41,-1296 h60
  text "B1" at -1754,-1337 h60
  text "B0" at -1754,-1463 h60
  text "IC4" at -2825,-1473 h60
  text "C" at -45,-1490 h60
  text "C" at -621,-1580 h60
  text "R" at -1754,-1589 h60
  text "C" at -45,-1710 h60
  text "C" at -1476,-1805 h60
  text "XTAL" at -444,-1810 h60
  text "SWD" at -2239,-1827 h60
  text "100uF/35V" at -3345,-1925 h60
  text "C" at -942,-1941 h60
  text "IC1" at -1244,-2001 h60
  text "1000uF/16V" at -2835,-2008 h60
  text "IC5" at -1436,-2473 h60
  text "D4" at -1697,-2580 h60
  text "D3" at -2482,-2582 h60
  text "1000uF/35V" at -3324,-2622 h60
  text "GND" at -2924,-2716 h60
  text "12-24V" at -2676,-2718 h60
  text "R" at -1393,-2785 h60
  text "R" at -1279.12,-2785 h60
  text "R" at -1165.25,-2785 h60
  text "R" at -1051.38,-2785 h60
  text "R" at -937.5,-2785 h60
  text "R" at -823.62,-2785 h60
  text "R" at -709.75,-2785 h60
  text "R" at -595.88,-2785 h60
  text "R" at -482,-2785 h60

## Text inside footprints (layer, text, board x,y; h text height)
C15: Top Overlay "+" at -2962,-1761 h47.24 r180
C16: Top Overlay "+" at -2796,-1754 h80 r180
H1: Top Overlay "1:VCC" at -1873.74,-3200.39 h60 r90; Top Overlay "2:D+" at -1968.74,-3195.39 h60 r90; Top Overlay "3:D-" at -2057.74,-3198.39 h60 r90; Top Overlay "4:GND" at -2144.74,-3197.39 h60 r90; Top Overlay "1" at -1895.74,-2653.39 h39.37 r90; Top Overlay "3" at -2157.74,-2747.39 h39.37 r90; Top Overlay "2" at -2152.74,-2662.39 h39.37 r90; Top Overlay "4" at -1902.74,-2754.39 h39.37 r90